# EAGLE board Copy of Wifi Module ESP8266  (EAGLE 7.6.0)

Size 73.58 x 177.69 mm. Coordinates in mm from the lower left corner, seen from the top.
Outline: 0,0 56.82,0 56.82,53.33 0,53.33 0,0
Copper layers (1*16): Top 0.035mm / dielectric 1.5mm / Bottom 0.035mm
Design rules "default": minimum track width 10mil, minimum drill 24mil, track to track 8mil, track to pad 8mil, pad to pad 8mil, via to via 8mil, smd to smd 8mil, copper to edge 40mil, drill to drill 8mil, minimum pad ring 10mil, minimum via ring 8mil, stop-mask expansion 4mil, vias tented up to drill 0mil, thermal gap 10mil

## Footprints (pad centres in the part's own frame; a part is rotated, then mirrored left to right if it is on the bottom)
DC-POWER = drill 0.889 pad 2.54 octagon: + 0,2.54; - 0,-2.54
LED5MM = drill 0.813 octagon: A -1.27,0; K 1.27,0
1X3P-2.54-2.54-11.6-3.0-BLACK-MALE = drill 0.889 pad 1.651 square: 1 0,2.54 | drill 0.889 pad 1.651: 2 0,0; 3 0,-2.54
0207/10 = drill 0.813 octagon: 1 -5.08,0; 2 5.08,0
M251 = drill 0.813 long: 1 -2.54,0; 2 0,0; 3 2.54,0
ARDUINO_UNO = drill 1.016 pad 1.88: 0 63.5,50.8; 1 60.96,50.8; 2 58.42,50.8; 3 55.88,50.8; 3.3V 35.56,2.54; 4 53.34,50.8; 5 50.8,50.8; 5V 38.1,2.54; 6 48.26,50.8; 7 45.72,50.8; 8 41.656,50.8; 9 39.116,50.8; 10 36.576,50.8; 11 34.036,50.8; 12 31.496,50.8; 13 28.956,50.8; A0 50.8,2.54; A1 53.34,2.54; A2 55.88,2.54; A3 58.42,2.54; A4 60.96,2.54; A5 63.5,2.54; AREF 23.876,50.8; GND 26.416,50.8; GND. 43.18,2.54; GND.. 40.64,2.54; I/OREF 30.48,2.54; N/C 27.94,2.54; RESET 33.02,2.54; SCL 18.796,50.8; SDA 21.336,50.8; VIN 45.72,2.54 | hole 3.2: 66.04,7.62; 66.04,35.56; 15.24,50.8; 13.97,2.54
2X4P-2.54-65/35MIL = drill 0.889 pad 1.651 square: 1 -1.27,3.81 | drill 0.889 pad 1.651: 2 -1.27,1.27; 3 -1.27,-1.27; 4 -1.27,-3.81; 5 1.27,-3.81; 6 1.27,-1.27; 7 1.27,1.27; 8 1.27,3.81
DIL16 = drill 0.813 long: 1 -8.89,-3.81; 2 -6.35,-3.81; 3 -3.81,-3.81; 4 -1.27,-3.81; 5 1.27,-3.81; 6 3.81,-3.81; 7 6.35,-3.81; 8 8.89,-3.81; 9 8.89,3.81; 10 6.35,3.81; 11 3.81,3.81; 12 1.27,3.81; 13 -1.27,3.81; 14 -3.81,3.81; 15 -6.35,3.81; 16 -8.89,3.81

## Placement (x,y rotation side)
BAT1  [DC-POWER]  5,98.98 0 top
D1  [LED5MM]  5,60.88 0 top
PIR1  [1X3P-2.54-2.54-11.6-3.0-BLACK-MALE]  5,137.08 0 top
R1  10k‎Ω  [0207/10]  5,35.48 0 top
R2  5.8k‎Ω  [0207/10]  5,111.68 0 top
S1  [M251]  5,48.18 0 top
U1  [ARDUINO_UNO]  5,10.08 0 top
U2  [2X4P-2.54-65/35MIL]  5,22.78 0 top
U3  [DIL16]  5,73.58 0 top
U4  [DIL16]  5,86.28 0 top
U5  [ARDUINO_UNO]  5,124.38 0 top

## Library data of the parts
BAT1 D1 PIR1 R1 R2 S1 U1-U5 = AUTODESK_CIRCUITS_BREADBOARD

## Nets
N$1: U3.3
N$2: U3.7
N$3: U1.3 U3.1
N$4: U1.5 U3.9
N$5: U1.2 U3.2
N$6: U1.4 U3.6
N$7: U1.8 U3.15
N$8: U1.7 U3.10
N$9: U3.14
N$10: U3.11
N$11: R1.2 R2.2 U2.1
N$12: R2.1 U1.1
N$13: D1.K R1.1 S1.1 U1.GND U2.4
N$14: S1.3 U1.3.3V U2.8
N$15: U1.0 U2.5
N$16: BAT1.- U1.GND.. U3.4 U3.5 U3.12 U3.13 U4.4 U4.5 U4.12 U4.13
N$17: BAT1.+ U3.8 U3.16 U4.8 U4.16
N$18: U4.3
N$19: U4.6
N$20: U4.14
N$21: U4.11
N$22: U4.1 U5.3
N$23: U4.9 U5.5
N$24: U4.2 U5.2
N$25: U4.7 U5.4
N$26: U4.15 U5.6
N$27: U4.10 U5.7
N$28: S1.2 U1.10 U2.7
N$29: D1.A U2.6
N$30: PIR1.1 U1.GND.
N$31: PIR1.3 U5.5V
N$32: PIR1.2 U5.A0

## Tracks (layer width: path | path; a pad name or v marks a point on that pad's centre or on a via)
N$3  (1 unrouted)
N$4  (1 unrouted)
N$5  (1 unrouted)
N$6  (1 unrouted)
N$7  (1 unrouted)
N$8  (1 unrouted)
N$11  (2 unrouted)
N$12  (1 unrouted)
N$13  (4 unrouted)
N$14  (2 unrouted)
N$15  (1 unrouted)
N$16  (9 unrouted)
N$17  (4 unrouted)
N$22  (1 unrouted)
N$23  (1 unrouted)
N$24  (1 unrouted)
N$25  (1 unrouted)
N$26  (1 unrouted)
N$27  (1 unrouted)
N$28  (2 unrouted)
N$29  (1 unrouted)
N$30  (1 unrouted)
N$31  (1 unrouted)
N$32  (1 unrouted)